# Altium PCB uCurrentRev5_A.PcbDoc
Units mm, origin at the board's own origin, x right, y up, seen from the top; angles counter-clockwise.
Board outline 38 x 63 mm, 2 copper layers (Top Layer, Bottom Layer); 4 components, 0 nets, 9 pads, 0 vias.
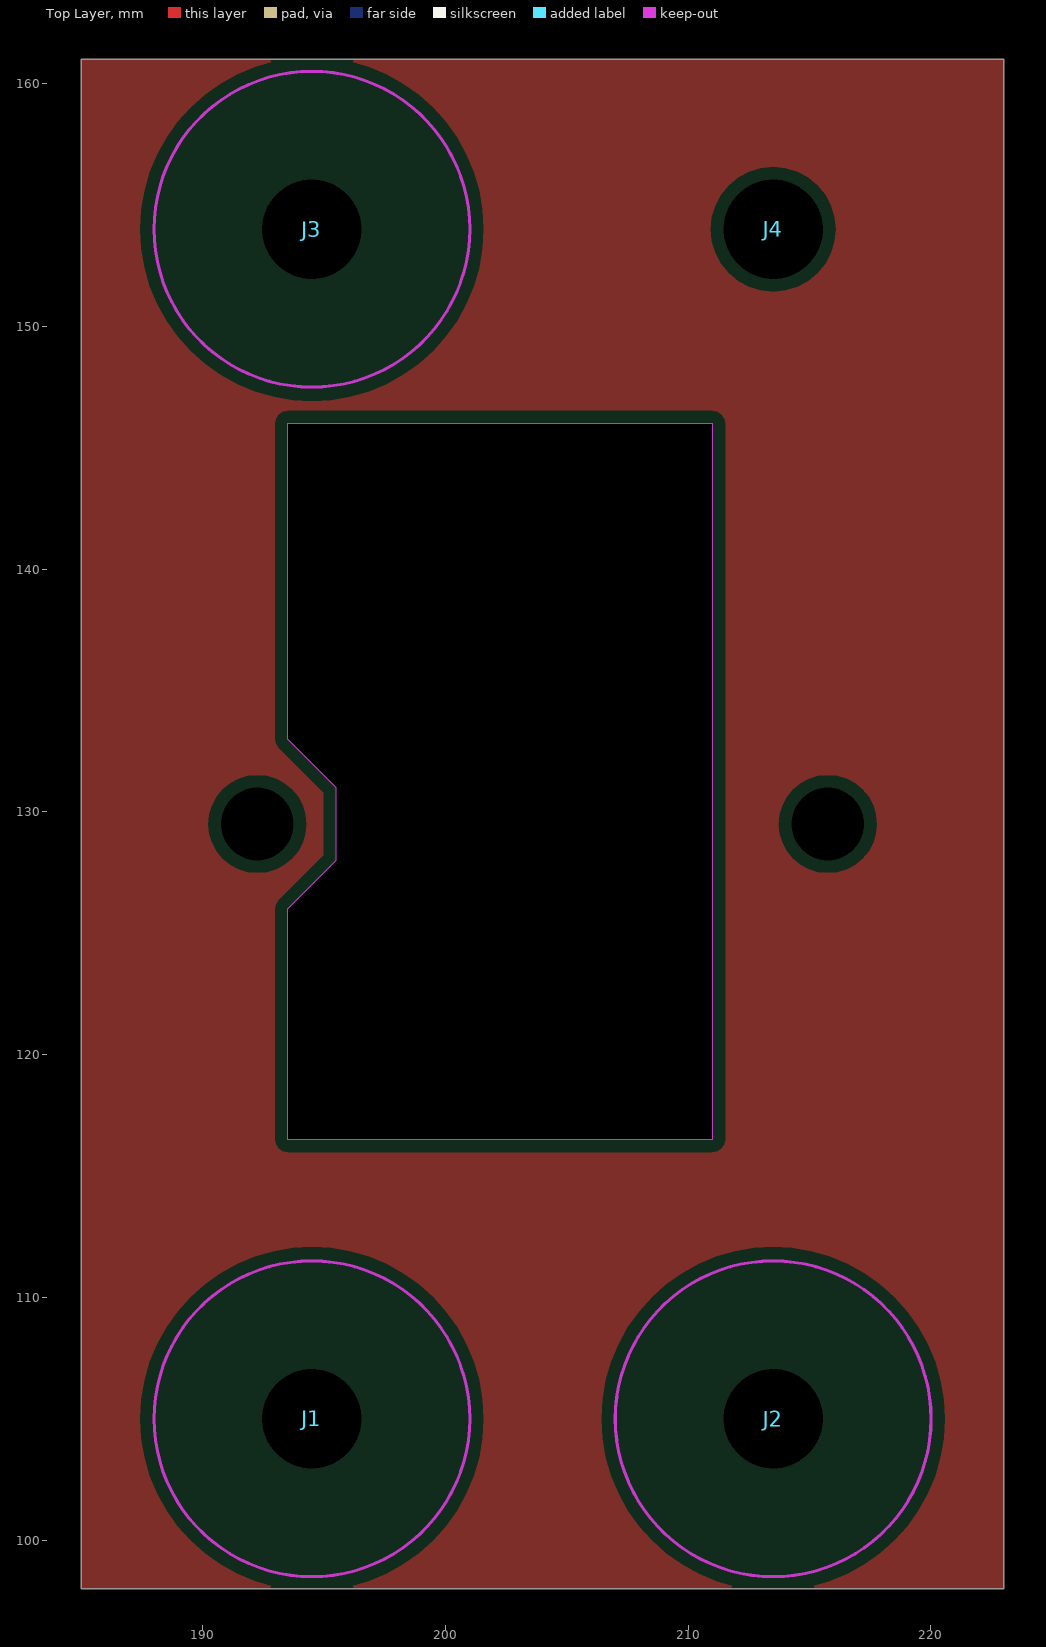
[diagram p0: Top Layer view]
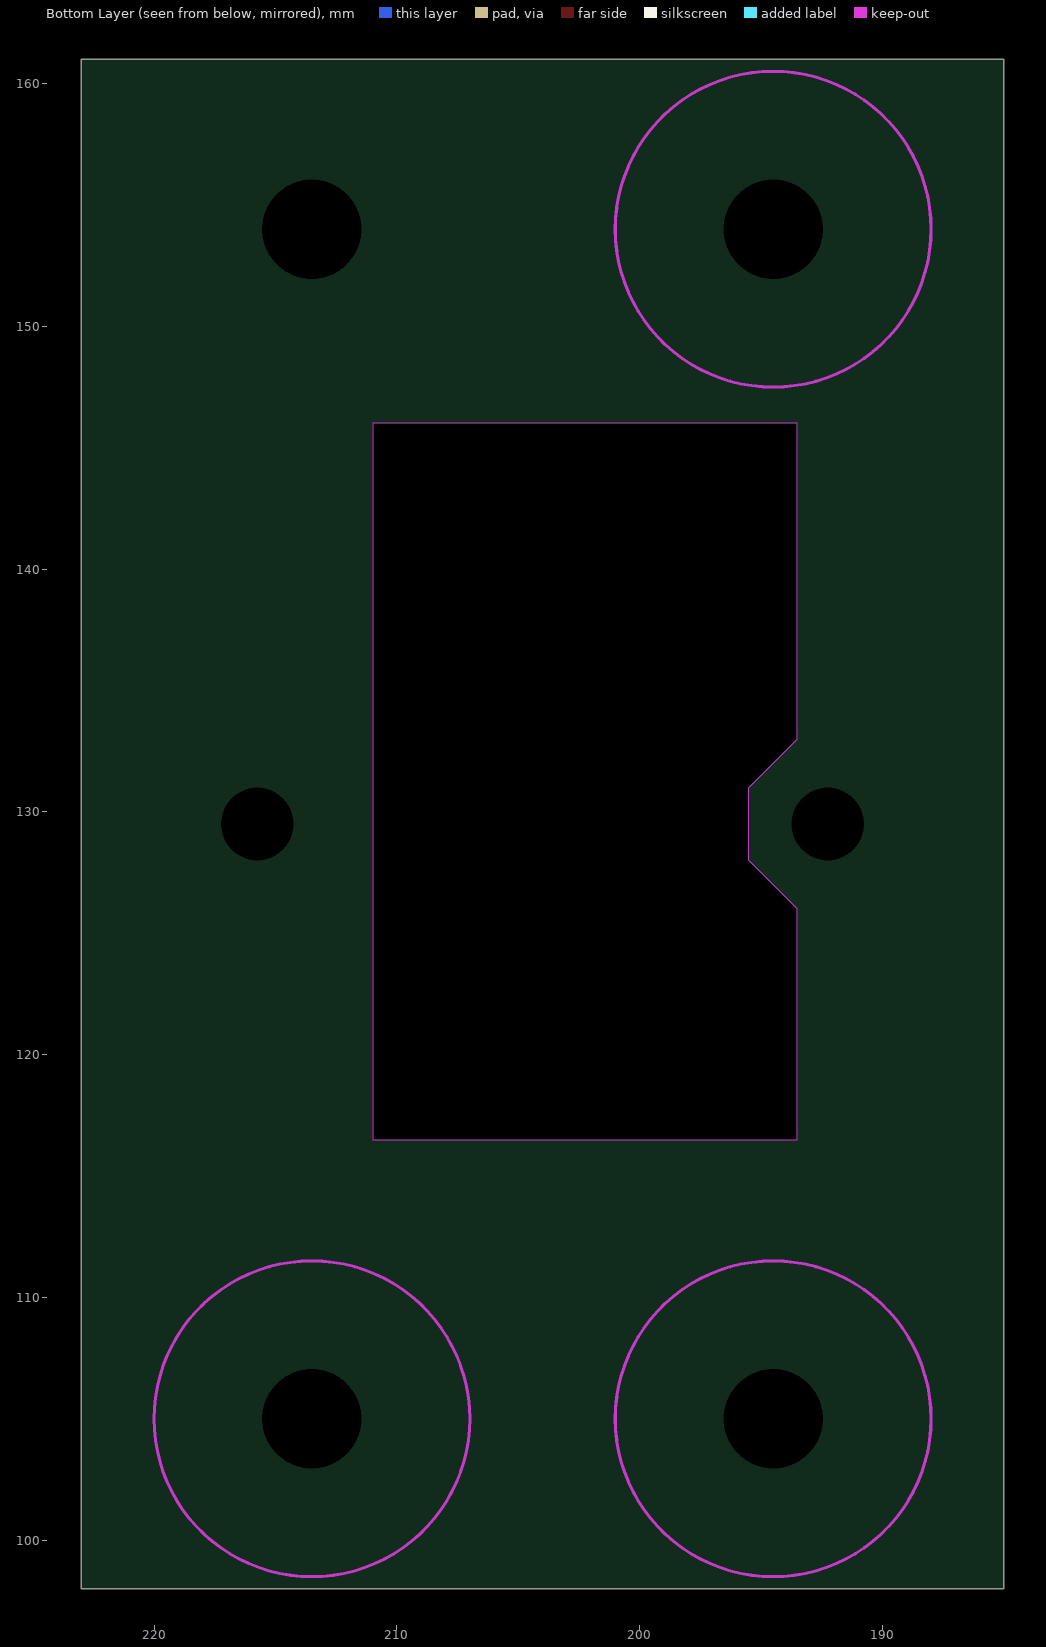
[diagram p1: Bottom Layer view, seen from below]

## Layer stack, top to bottom
Top Solder: solder mask 0.0102, Solder Resist, Dk 3.5
Top Layer: signal copper 0.0356
Dielectric1: dielectric 0.32, FR-4, Dk 4.8
Bottom Layer: signal copper 0.0356
Bottom Solder: solder mask 0.0102, Solder Resist, Dk 3.5

## Board outline
185,98 223,98 223,161 185,161
cut-out: 193.5,146 211,146 211,116.5 193.5,116.5 193.5,126 195.5,128 195.5,131 193.5,133

## Design rules (kind name [scope] priority, off if disabled: settings)
Clearance Clearance_3 [InNamedPolygon('Top Layer-No Net')] p1: gap=0.508
Clearance Clearance_2 [InNamedPolygon('Top Layer-No Net')] p2: gap=0.254
Clearance Clearance_1 [InNamedPolygon('Top Layer-No Net')] p3: gap=0.508
Clearance [All] p4: gap=0.635
FabricationTestPointUsage TestPointUsage [All] p1: valid=0 allowmultiple=FALSE
FabricationTestpoint Testpoint [All] p1: side=3 testpointundercomponent=TRUE minsize=1.016 maxsize=2.54 preferedsize=1.524 minholesize=0 maxholesize=1.016 preferedholesize=0.813 testpointgrid=0.025 allowsidetop=TRUE allowsidebottom=TRUE usegrid=TRUE gridtolerance=0
HoleSize [All] p1: absolutevalues=TRUE maxlimit=5 minlimit=0.025 maxpercent=80.000 minpercent=20.000
PolygonConnect [All] p1: connectstyle=Direct reliefconductorwidth=0.254 reliefentries=4 polygonreliefangle="90 Angle" airgapwidth=0.254
RoutingVias [All] p1: holewidth=0.4 width=0.8 viastyle="Through Hole" minholewidth=0.4 minwidth=0.8 maxholewidth=0.4 maxwidth=0.8
SilkToSolderMaskClearance SilkscreenOverComponentPads [IsPad] p1: minsilkscreentomaskgap=0.254 clearancetoexposedcopper=TRUE
SolderMaskExpansion [All] p1: expansion=0.051
Width [All] p1: maxlimit=3.81 minlimit=0.203 preferedwidth=0.381 minimp=50.000000 maximp=50.000000 favimp=50.000000
25 further rules are at their usual default settings.

## Components (designator, comment, footprint, x,y, rotation, side; value= is the part's Value field where it differs from the comment)
J1 "4mmBindingPostRed" PIN1 194.5,105 r0 top locked
J2 "4mmBindingPostBlack" PIN1 213.5,105 r0 top locked
J3 "4mmBindingPostRed" PIN1 194.5,154 r0 top locked
J4 "4mmBindingPostBlack" PIN1 213.5,154 r0 top locked

## Footprints (in the part's own frame and the unit in brackets; to place one, negate y for a bottom-side part, rotate by r counter-clockwise, add the part's x,y. Pads: shape width x height; smd on the part's side, far side on the other; paste and mask are expansions set on the pad)
PIN1 [mm] "Connector; Plug"
  round 4 hole 4.1 mask+0: 1(0,0)

## Free pads (board coordinates)
  round 13 on Keep-Out: 0(194.5,105) 0(194.5,154) 0(213.5,105)
  round 1.524 hole 3: 1(192.25,129.5) 2(215.75,129.5)

## Nets (pads, with @x,y where several pads share a name; then routed paths per layer and width w, separated by ;. In a path a pad name is that pad's centre, name@x,y a point inside that pad or via, vN(x,y) a via of type N, cw(c..) or ccw(c..) an arc to the next point about the centre after c; other vN are vias at no path point)
pads on no net: J1.1 J2.1 J3.1 J4.1

## Polygon pours and split planes (outlines as drawn)
no net on Top Layer "Top Layer-No Net" (solid, pour order 2): 185,161 223,161 223,98 185,98

## Keep-outs
Keep-Out Layer:
  circle w0.127: c213.5,105 r6.505
  circle w0.127: c194.5,105 r6.505
  circle w0.127: c194.5,154 r6.505

## Silkscreen, mask and mechanical layers (free items; w line width, h text height)
Mechanical 1:
  the board outline again, w0.127
Mechanical 2:
  lines w0.25: 193.5,116.5 193.5,126 195.5,128 195.5,131 193.5,133 193.5,146 211,146 211,116.5 193.5,116.5
Mechanical 16:
  lines w0.127: 53.944,72.131 59.024,72.131 ; 53.944,120.391 59.024,120.391 ; 53.944,168.651 59.024,168.651 ; 126.969,23.871 126.969,28.951 ; 126.969,211.831 126.969,216.911 ; 191.104,28.951 226.664,28.951 ; 199.994,23.871 199.994,28.951 ; 199.994,211.831 199.994,216.911 ; 221.051,28.976 221.076,28.951 ; 235.894,28.951 235.894,52.04 340.964,52.04 ; 235.919,44.521 340.939,44.521 ; 235.944,36.546 340.939,36.546 ; 254.874,28.951 254.874,36.546 ; 254.894,32.532 340.939,32.532 ; 273.019,211.831 273.019,216.911 ; 286.415,29.002 286.415,36.52 ; 315.344,36.546 315.344,52.04 ; 330.369,44.521 330.369,52.037 ; 340.964,72.131 346.044,72.131 ; 340.964,120.391 346.044,120.391 ; 340.964,168.651 346.044,168.651 ; 53.944,23.871 346.044,23.871 346.044,216.911 53.944,216.911 53.944,23.871 ; 59.024,28.951 59.024,211.831 340.964,211.831 340.964,54.224 340.964,28.951 59.024,28.951
  text "1" at 90.19,213.482 h1.78
  text "2" at 162.834,213.482 h1.78
  text "3" at 235.986,213.482 h1.78
  text "4" at 308.884,213.482 h1.78
  text "A" at 55.849,190.47 h1.78
  text "A" at 342.869,190.47 h1.78
  text "B" at 55.849,142.413 h1.78
  text "B" at 342.869,142.413 h1.78
  text "C" at 55.849,93.899 h1.78
  text "C" at 342.869,93.899 h1.78
  text "PROJECT NAME:" at 236.808,50.033 h1.14
  text "REVISION:" at 316.258,50.033 h1.14
  text "A4" at 333.719,46.962 h2.29
  text "BatteryHolderForuCurrentGOLD_A.PcbDoc" at 241.5,46.5 h2.54
  text "1.0.0" at 319.544,46.187 h1.78
  text "D" at 55.849,45.893 h1.78
  text "PROJECT NUMBER:" at 316.233,42.515 h1.14
  text "TITLE:" at 236.783,42.438 h1.14
  text "Battery Holder For uCurrent GOLD Board A" at 243.758,38.349 h2.16
  text "ONW-000" at 323.719,38.337 h1.78
  text "DATE:" at 236.91,34.336 h1.14
  text "Pawel Poryzala" at 304.678,33.852 h1.52
  text "1" at 266.097,33.777 h1.52
  text "DRAWN BY:" at 287.482,33.776 h1.52
  text "of" at 269.78,33.701 h1.52
  text "1" at 274.199,33.701 h1.52
  text "SHEET" at 256.318,33.675 h1.52
  text "20/03/2014" at 238.078,30.221 h1.52
  text "Pawel Poryzala" at 304.703,30.22 h1.52
  text "CHECKED BY:" at 287.456,30.093 h1.52
  text ".PCB_FILE_NAME_NO_PATH" at 256.216,30.069 h1.52
  text "1" at 90.19,25.522 h1.78
  text "2" at 162.834,25.522 h1.78

## Dimensions
185,161 to 185,98 on Top Overlay
185,161 to 223,161 on Top Overlay